# EAGLE board LilyTiny-Panel-v12 (EAGLE 6.5.0), part 1 of 2
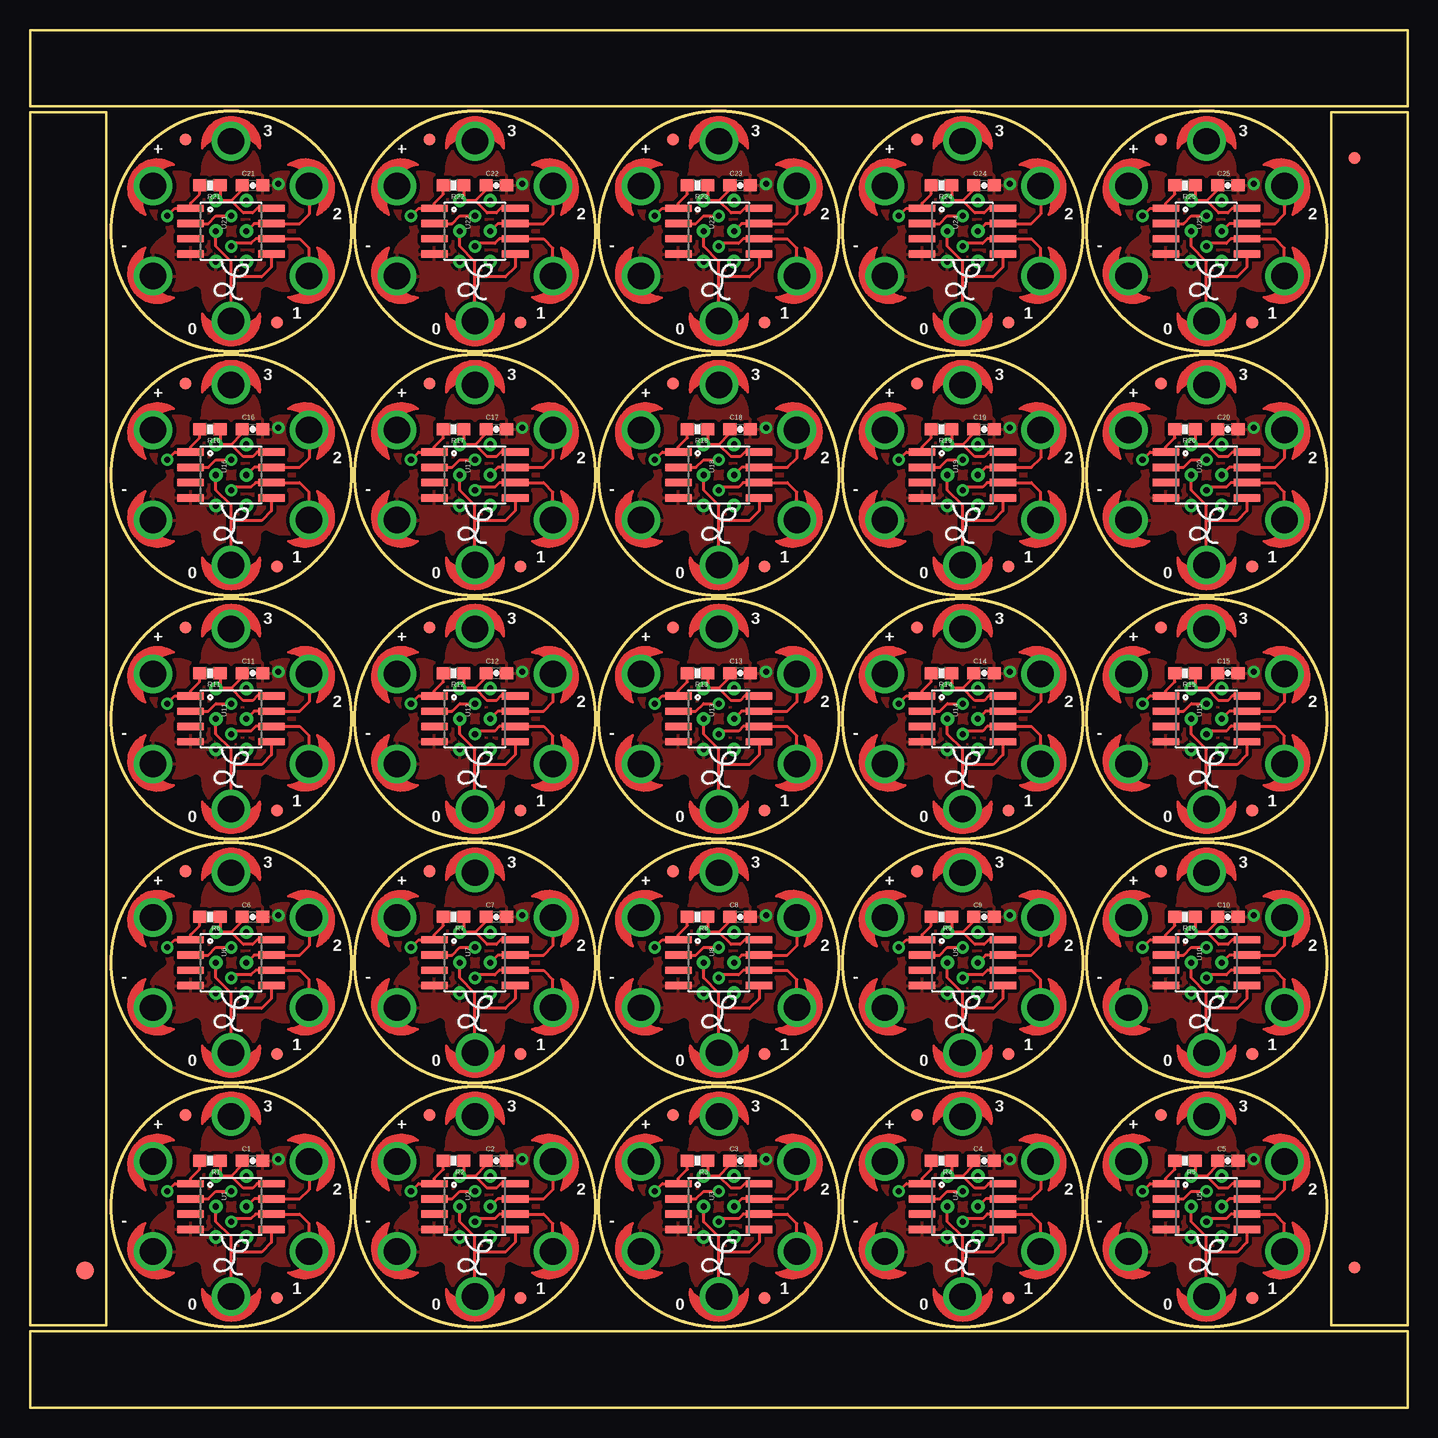
[diagram p0: board, top side]
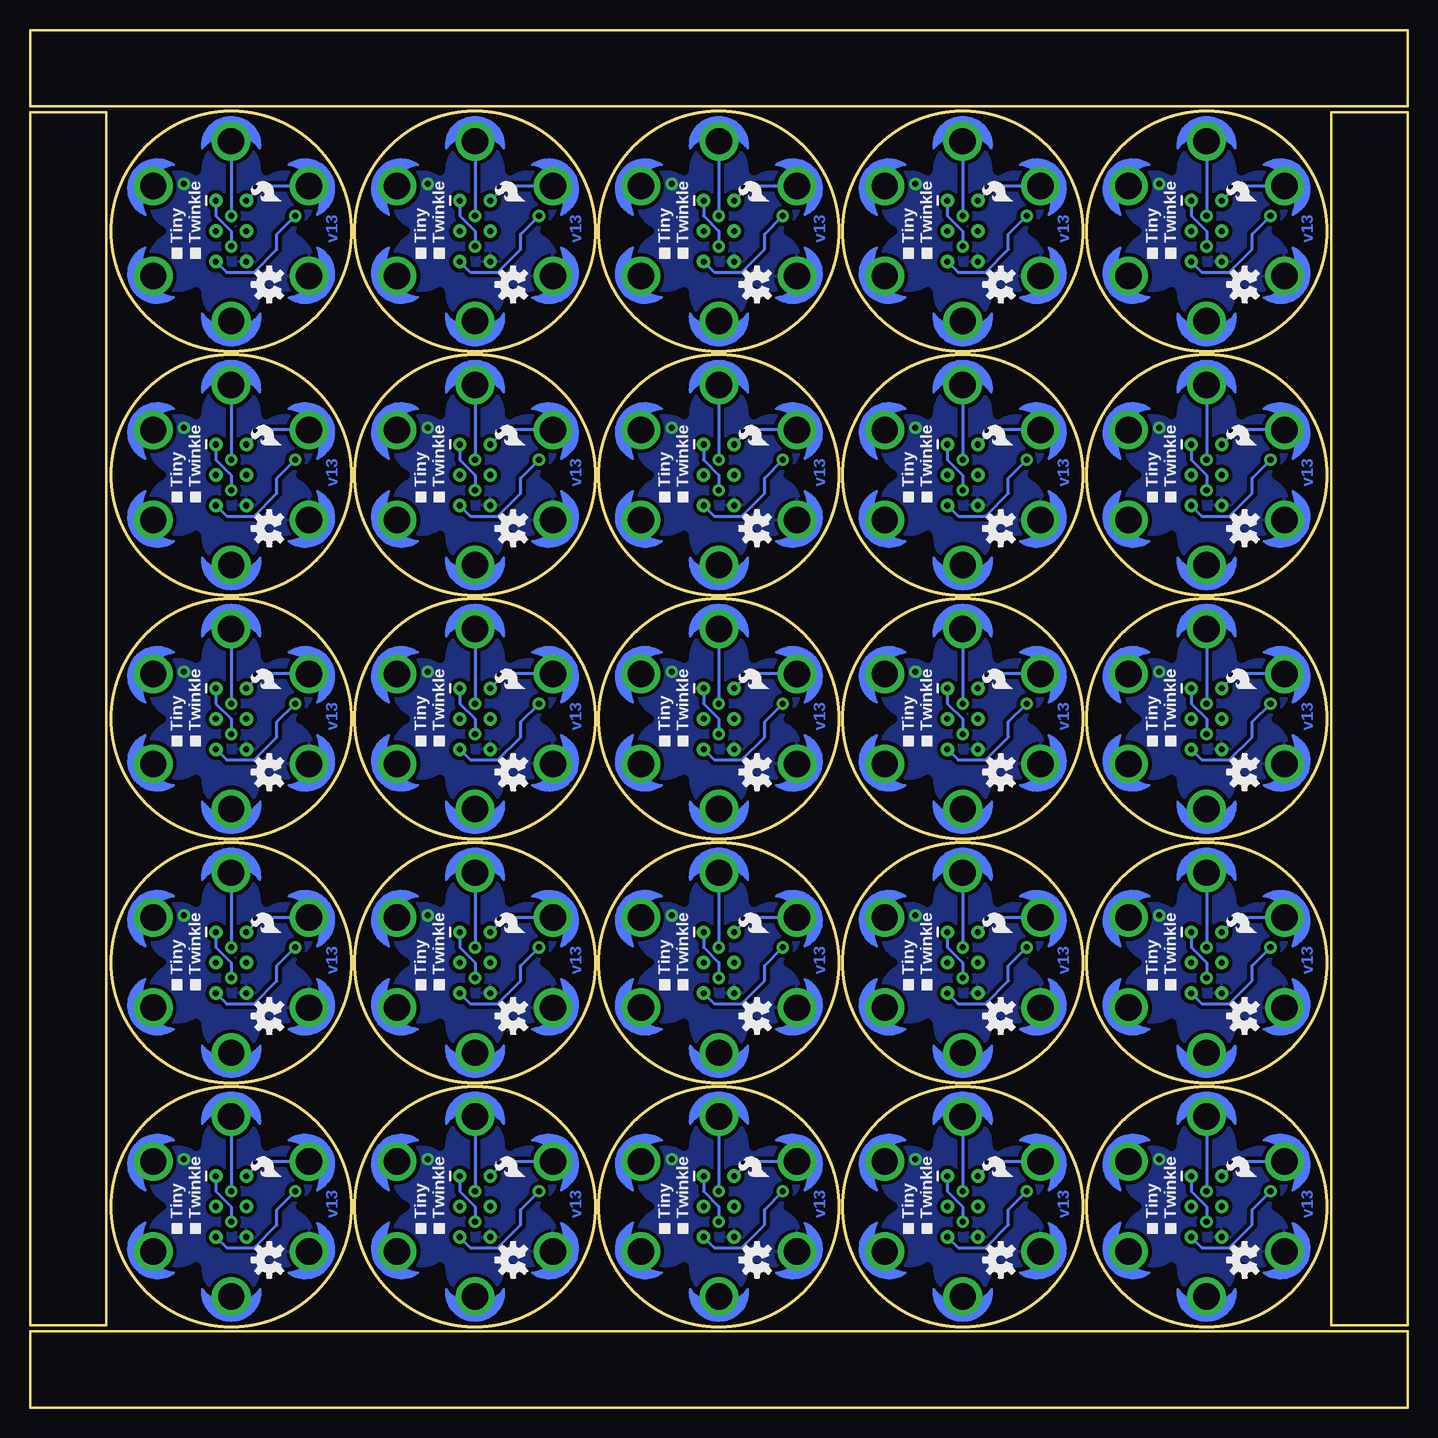
[diagram p1: board, bottom side, seen from below]

Size 114.81 x 114.81 mm. Coordinates in mm from the lower left corner, seen from the top.
Outline: 79.25,0 0,0 0,6.35 29.72,6.35
Outline: 29.21,6.35 114.81,6.35 114.81,0 78.74,0
Outline: 6.35,6.86 6.35,107.95 0,107.95 0,6.86 6.35,6.86
Outline: 114.81,6.86 114.81,107.95 108.46,107.95 108.46,6.86 114.81,6.86
Outline: 114.81,114.81 0,114.81 0,108.46 114.81,108.46 114.81,114.81
Outline: circle at 16.76,16.76 radius 10
Outline: circle at 37.08,16.76 radius 10
Outline: circle at 57.4,16.76 radius 10
Outline: circle at 77.72,16.76 radius 10
Outline: circle at 98.04,16.76 radius 10
Outline: circle at 16.76,37.08 radius 10
Outline: circle at 37.08,37.08 radius 10
Outline: circle at 57.4,37.08 radius 10
Outline: circle at 77.72,37.08 radius 10
Outline: circle at 98.04,37.08 radius 10
Outline: circle at 16.76,57.4 radius 10
Outline: circle at 37.08,57.4 radius 10
Outline: circle at 57.4,57.4 radius 10
Outline: circle at 77.72,57.4 radius 10
Outline: circle at 98.04,57.4 radius 10
Outline: circle at 16.76,77.72 radius 10
Outline: circle at 37.08,77.72 radius 10
Outline: circle at 57.4,77.72 radius 10
Outline: circle at 77.72,77.72 radius 10
Outline: circle at 98.04,77.72 radius 10
Copper layers (1*16): Top 0.035mm / dielectric 1.5mm / Bottom 0.035mm
Design rules "SparkFun-2-layer": minimum track width 7mil, minimum drill 15mil, track to track 8mil, track to pad 8mil, pad to pad 8mil, via to via 8mil, smd to smd 8mil, copper to edge 8mil, drill to drill 8mil, minimum pad ring 12mil, minimum via ring 10mil, stop-mask expansion 4mil, vias tented up to drill 20mil, thermal gap 10mil
tRestrict: area 5.8,16.8 to 16.8,27.8; area 16.8,16.8 to 27.8,27.8; area 16.8,5.8 to 27.8,16.8; area 5.8,5.8 to 16.8,16.8; area 26.1,16.8 to 37.1,27.8; area 37.1,16.8 to 48.1,27.8; area 37.1,5.8 to 48.1,16.8; area 26.1,5.8 to 37.1,16.8; area 46.4,16.8 to 57.4,27.8; area 57.4,16.8 to 68.4,27.8; area 57.4,5.8 to 68.4,16.8; area 46.4,5.8 to 57.4,16.8; 88 more areas; 150 lines
bRestrict: area 5.8,16.8 to 16.8,27.8; area 16.8,16.8 to 27.8,27.8; area 16.8,5.8 to 27.8,16.8; area 5.8,5.8 to 16.8,16.8; area 26.1,16.8 to 37.1,27.8; area 37.1,16.8 to 48.1,27.8; area 37.1,5.8 to 48.1,16.8; area 26.1,5.8 to 37.1,16.8; area 46.4,16.8 to 57.4,27.8; area 57.4,16.8 to 68.4,27.8; area 57.4,5.8 to 68.4,16.8; area 46.4,5.8 to 57.4,16.8; 88 more areas; 150 lines

## Footprints (pad centres in the part's own frame; a part is rotated, then mirrored left to right if it is on the bottom)
0603-CAP = smd 1.1 x 1: 1 -0.85,0; 2 0.85,0
FIDUCIAL-1.5X3 = smd 1.5 x 1.5: 1 0,0
FIDUCIAL-1X2 = smd 1 x 1: 1 0,0
2X3_TEST_POINTS = drill 0.508: 1 -2.54,-1.27; 2 -2.54,1.27; 3 0,-1.27; 4 0,1.27; 5 2.54,-1.27; 6 2.54,1.27
0603-RES = smd 1.1 x 1: 1 -0.85,0; 2 0.85,0
SO08-EIAJ = smd 0.61 x 2.21: 1 -1.905,-3.378; 2 -0.635,-3.378; 3 0.635,-3.378; 4 1.905,-3.378; 5 1.905,3.353; 6 0.635,3.353; 7 -0.635,3.353; 8 -1.905,3.353
PETAL-SMALL-2SIDE = drill 2.2: 1 0,0

## Placement (x,y rotation side)
C1  0.1uF  [0603-CAP]  18.54,20.57 0 top
C2  0.1uF  [0603-CAP]  38.86,20.57 0 top
C3  0.1uF  [0603-CAP]  59.18,20.57 0 top
C4  0.1uF  [0603-CAP]  79.5,20.57 0 top
C5  0.1uF  [0603-CAP]  99.82,20.57 0 top
C6  0.1uF  [0603-CAP]  18.54,40.89 0 top
C7  0.1uF  [0603-CAP]  38.86,40.89 0 top
C8  0.1uF  [0603-CAP]  59.18,40.89 0 top
C9  0.1uF  [0603-CAP]  79.5,40.89 0 top
C10  0.1uF  [0603-CAP]  99.82,40.89 0 top
C11  0.1uF  [0603-CAP]  18.54,61.21 0 top
C12  0.1uF  [0603-CAP]  38.86,61.21 0 top
C13  0.1uF  [0603-CAP]  59.18,61.21 0 top
C14  0.1uF  [0603-CAP]  79.5,61.21 0 top
C15  0.1uF  [0603-CAP]  99.82,61.21 0 top
C16  0.1uF  [0603-CAP]  18.54,81.53 0 top
C17  0.1uF  [0603-CAP]  38.86,81.53 0 top
C18  0.1uF  [0603-CAP]  59.18,81.53 0 top
C19  0.1uF  [0603-CAP]  79.5,81.53 0 top
C20  0.1uF  [0603-CAP]  99.82,81.53 0 top
C21  0.1uF  [0603-CAP]  18.54,101.85 0 top
C22  0.1uF  [0603-CAP]  38.86,101.85 0 top
C23  0.1uF  [0603-CAP]  59.18,101.85 0 top
C24  0.1uF  [0603-CAP]  79.5,101.85 0 top
C25  0.1uF  [0603-CAP]  99.82,101.85 0 top
E$1  [FIDUCIAL-1.5X3]  4.57,11.43 0 top
E$4  [FIDUCIAL-1X2]  110.36,11.68 0 top
E$6  [FIDUCIAL-1X2]  110.36,104.14 180 top
FID1  FIDUCIAL1X2  [FIDUCIAL-1X2]  12.95,24.38 0 top
FID2  FIDUCIAL1X2  [FIDUCIAL-1X2]  20.57,9.14 0 top
FID3  FIDUCIAL1X2  [FIDUCIAL-1X2]  33.27,24.38 0 top
FID4  FIDUCIAL1X2  [FIDUCIAL-1X2]  40.89,9.14 0 top
FID5  FIDUCIAL1X2  [FIDUCIAL-1X2]  53.59,24.38 0 top
FID6  FIDUCIAL1X2  [FIDUCIAL-1X2]  61.21,9.14 0 top
FID7  FIDUCIAL1X2  [FIDUCIAL-1X2]  73.91,24.38 0 top
FID8  FIDUCIAL1X2  [FIDUCIAL-1X2]  81.53,9.14 0 top
FID9  FIDUCIAL1X2  [FIDUCIAL-1X2]  94.23,24.38 0 top
FID10  FIDUCIAL1X2  [FIDUCIAL-1X2]  101.85,9.14 0 top
FID11  FIDUCIAL1X2  [FIDUCIAL-1X2]  12.95,44.7 0 top
FID12  FIDUCIAL1X2  [FIDUCIAL-1X2]  20.57,29.46 0 top
FID13  FIDUCIAL1X2  [FIDUCIAL-1X2]  33.27,44.7 0 top
FID14  FIDUCIAL1X2  [FIDUCIAL-1X2]  40.89,29.46 0 top
FID15  FIDUCIAL1X2  [FIDUCIAL-1X2]  53.59,44.7 0 top
FID16  FIDUCIAL1X2  [FIDUCIAL-1X2]  61.21,29.46 0 top
FID17  FIDUCIAL1X2  [FIDUCIAL-1X2]  73.91,44.7 0 top
FID18  FIDUCIAL1X2  [FIDUCIAL-1X2]  81.53,29.46 0 top
FID19  FIDUCIAL1X2  [FIDUCIAL-1X2]  94.23,44.7 0 top
FID20  FIDUCIAL1X2  [FIDUCIAL-1X2]  101.85,29.46 0 top
FID21  FIDUCIAL1X2  [FIDUCIAL-1X2]  12.95,65.02 0 top
FID22  FIDUCIAL1X2  [FIDUCIAL-1X2]  20.57,49.78 0 top
FID23  FIDUCIAL1X2  [FIDUCIAL-1X2]  33.27,65.02 0 top
FID24  FIDUCIAL1X2  [FIDUCIAL-1X2]  40.89,49.78 0 top
FID25  FIDUCIAL1X2  [FIDUCIAL-1X2]  53.59,65.02 0 top
FID26  FIDUCIAL1X2  [FIDUCIAL-1X2]  61.21,49.78 0 top
FID27  FIDUCIAL1X2  [FIDUCIAL-1X2]  73.91,65.02 0 top
FID28  FIDUCIAL1X2  [FIDUCIAL-1X2]  81.53,49.78 0 top
FID29  FIDUCIAL1X2  [FIDUCIAL-1X2]  94.23,65.02 0 top
FID30  FIDUCIAL1X2  [FIDUCIAL-1X2]  101.85,49.78 0 top
FID31  FIDUCIAL1X2  [FIDUCIAL-1X2]  12.95,85.34 0 top
FID32  FIDUCIAL1X2  [FIDUCIAL-1X2]  20.57,70.1 0 top
FID33  FIDUCIAL1X2  [FIDUCIAL-1X2]  33.27,85.34 0 top
FID34  FIDUCIAL1X2  [FIDUCIAL-1X2]  40.89,70.1 0 top
FID35  FIDUCIAL1X2  [FIDUCIAL-1X2]  53.59,85.34 0 top
FID36  FIDUCIAL1X2  [FIDUCIAL-1X2]  61.21,70.1 0 top
FID37  FIDUCIAL1X2  [FIDUCIAL-1X2]  73.91,85.34 0 top
FID38  FIDUCIAL1X2  [FIDUCIAL-1X2]  81.53,70.1 0 top
FID39  FIDUCIAL1X2  [FIDUCIAL-1X2]  94.23,85.34 0 top
FID40  FIDUCIAL1X2  [FIDUCIAL-1X2]  101.85,70.1 0 top
FID41  FIDUCIAL1X2  [FIDUCIAL-1X2]  12.95,105.66 0 top
FID42  FIDUCIAL1X2  [FIDUCIAL-1X2]  20.57,90.42 0 top
FID43  FIDUCIAL1X2  [FIDUCIAL-1X2]  33.27,105.66 0 top
FID44  FIDUCIAL1X2  [FIDUCIAL-1X2]  40.89,90.42 0 top
FID45  FIDUCIAL1X2  [FIDUCIAL-1X2]  53.59,105.66 0 top
FID46  FIDUCIAL1X2  [FIDUCIAL-1X2]  61.21,90.42 0 top
FID47  FIDUCIAL1X2  [FIDUCIAL-1X2]  73.91,105.66 0 top
FID48  FIDUCIAL1X2  [FIDUCIAL-1X2]  81.53,90.42 0 top
FID49  FIDUCIAL1X2  [FIDUCIAL-1X2]  94.23,105.66 0 top
FID50  FIDUCIAL1X2  [FIDUCIAL-1X2]  101.85,90.42 0 top
J1  [2X3_TEST_POINTS]  16.76,16.76 270 bottom
J2  [2X3_TEST_POINTS]  37.08,16.76 270 bottom
J3  [2X3_TEST_POINTS]  57.4,16.76 270 bottom
J4  [2X3_TEST_POINTS]  77.72,16.76 270 bottom
J5  [2X3_TEST_POINTS]  98.04,16.76 270 bottom
J6  [2X3_TEST_POINTS]  16.76,37.08 270 bottom
J7  [2X3_TEST_POINTS]  37.08,37.08 270 bottom
J8  [2X3_TEST_POINTS]  57.4,37.08 270 bottom
J9  [2X3_TEST_POINTS]  77.72,37.08 270 bottom
J10  [2X3_TEST_POINTS]  98.04,37.08 270 bottom
J11  [2X3_TEST_POINTS]  16.76,57.4 270 bottom
J12  [2X3_TEST_POINTS]  37.08,57.4 270 bottom
J13  [2X3_TEST_POINTS]  57.4,57.4 270 bottom
J14  [2X3_TEST_POINTS]  77.72,57.4 270 bottom
J15  [2X3_TEST_POINTS]  98.04,57.4 270 bottom
J16  [2X3_TEST_POINTS]  16.76,77.72 270 bottom
J17  [2X3_TEST_POINTS]  37.08,77.72 270 bottom
J18  [2X3_TEST_POINTS]  57.4,77.72 270 bottom
J19  [2X3_TEST_POINTS]  77.72,77.72 270 bottom
J20  [2X3_TEST_POINTS]  98.04,77.72 270 bottom
J21  [2X3_TEST_POINTS]  16.76,98.04 270 bottom
J22  [2X3_TEST_POINTS]  37.08,98.04 270 bottom
J23  [2X3_TEST_POINTS]  57.4,98.04 270 bottom
J24  [2X3_TEST_POINTS]  77.72,98.04 270 bottom
J25  [2X3_TEST_POINTS]  98.04,98.04 270 bottom
LOGO1  OSHW-LOGOS  [OSHW-LOGO-S]  13.59,12.32 90 bottom
LOGO2  SFE_LOGO_FLAME.1_INCH  [SFE_LOGO_FLAME_.1]  12.22,18.94 90 bottom
LOGO3  OSHW-LOGOS  [OSHW-LOGO-S]  33.91,12.32 90 bottom
LOGO4  SFE_LOGO_FLAME.1_INCH  [SFE_LOGO_FLAME_.1]  32.54,18.94 90 bottom
LOGO5  OSHW-LOGOS  [OSHW-LOGO-S]  54.23,12.32 90 bottom
LOGO6  SFE_LOGO_FLAME.1_INCH  [SFE_LOGO_FLAME_.1]  52.86,18.94 90 bottom
LOGO7  OSHW-LOGOS  [OSHW-LOGO-S]  74.55,12.32 90 bottom
LOGO8  SFE_LOGO_FLAME.1_INCH  [SFE_LOGO_FLAME_.1]  73.18,18.94 90 bottom
LOGO9  OSHW-LOGOS  [OSHW-LOGO-S]  94.87,12.32 90 bottom
LOGO10  SFE_LOGO_FLAME.1_INCH  [SFE_LOGO_FLAME_.1]  93.5,18.94 90 bottom
LOGO11  OSHW-LOGOS  [OSHW-LOGO-S]  13.59,32.64 90 bottom
LOGO12  SFE_LOGO_FLAME.1_INCH  [SFE_LOGO_FLAME_.1]  12.22,39.26 90 bottom
LOGO13  OSHW-LOGOS  [OSHW-LOGO-S]  33.91,32.64 90 bottom
LOGO14  SFE_LOGO_FLAME.1_INCH  [SFE_LOGO_FLAME_.1]  32.54,39.26 90 bottom
LOGO15  OSHW-LOGOS  [OSHW-LOGO-S]  54.23,32.64 90 bottom
LOGO16  SFE_LOGO_FLAME.1_INCH  [SFE_LOGO_FLAME_.1]  52.86,39.26 90 bottom
LOGO17  OSHW-LOGOS  [OSHW-LOGO-S]  74.55,32.64 90 bottom
LOGO18  SFE_LOGO_FLAME.1_INCH  [SFE_LOGO_FLAME_.1]  73.18,39.26 90 bottom
LOGO19  OSHW-LOGOS  [OSHW-LOGO-S]  94.87,32.64 90 bottom
LOGO20  SFE_LOGO_FLAME.1_INCH  [SFE_LOGO_FLAME_.1]  93.5,39.26 90 bottom
LOGO21  OSHW-LOGOS  [OSHW-LOGO-S]  13.59,52.96 90 bottom
LOGO22  SFE_LOGO_FLAME.1_INCH  [SFE_LOGO_FLAME_.1]  12.22,59.58 90 bottom
LOGO23  OSHW-LOGOS  [OSHW-LOGO-S]  33.91,52.96 90 bottom
LOGO24  SFE_LOGO_FLAME.1_INCH  [SFE_LOGO_FLAME_.1]  32.54,59.58 90 bottom
LOGO25  OSHW-LOGOS  [OSHW-LOGO-S]  54.23,52.96 90 bottom
LOGO26  SFE_LOGO_FLAME.1_INCH  [SFE_LOGO_FLAME_.1]  52.86,59.58 90 bottom
LOGO27  OSHW-LOGOS  [OSHW-LOGO-S]  74.55,52.96 90 bottom
LOGO28  SFE_LOGO_FLAME.1_INCH  [SFE_LOGO_FLAME_.1]  73.18,59.58 90 bottom
LOGO29  OSHW-LOGOS  [OSHW-LOGO-S]  94.87,52.96 90 bottom
LOGO30  SFE_LOGO_FLAME.1_INCH  [SFE_LOGO_FLAME_.1]  93.5,59.58 90 bottom
LOGO31  OSHW-LOGOS  [OSHW-LOGO-S]  13.59,73.28 90 bottom
LOGO32  SFE_LOGO_FLAME.1_INCH  [SFE_LOGO_FLAME_.1]  12.22,79.9 90 bottom
LOGO33  OSHW-LOGOS  [OSHW-LOGO-S]  33.91,73.28 90 bottom
LOGO34  SFE_LOGO_FLAME.1_INCH  [SFE_LOGO_FLAME_.1]  32.54,79.9 90 bottom
LOGO35  OSHW-LOGOS  [OSHW-LOGO-S]  54.23,73.28 90 bottom
LOGO36  SFE_LOGO_FLAME.1_INCH  [SFE_LOGO_FLAME_.1]  52.86,79.9 90 bottom
LOGO37  OSHW-LOGOS  [OSHW-LOGO-S]  74.55,73.28 90 bottom
LOGO38  SFE_LOGO_FLAME.1_INCH  [SFE_LOGO_FLAME_.1]  73.18,79.9 90 bottom
LOGO39  OSHW-LOGOS  [OSHW-LOGO-S]  94.87,73.28 90 bottom
LOGO40  SFE_LOGO_FLAME.1_INCH  [SFE_LOGO_FLAME_.1]  93.5,79.9 90 bottom
LOGO41  OSHW-LOGOS  [OSHW-LOGO-S]  13.59,93.6 90 bottom
LOGO42  SFE_LOGO_FLAME.1_INCH  [SFE_LOGO_FLAME_.1]  12.22,100.22 90 bottom
LOGO43  OSHW-LOGOS  [OSHW-LOGO-S]  33.91,93.6 90 bottom
LOGO44  SFE_LOGO_FLAME.1_INCH  [SFE_LOGO_FLAME_.1]  32.54,100.22 90 bottom
LOGO45  OSHW-LOGOS  [OSHW-LOGO-S]  54.23,93.6 90 bottom
LOGO46  SFE_LOGO_FLAME.1_INCH  [SFE_LOGO_FLAME_.1]  52.86,100.22 90 bottom
LOGO47  OSHW-LOGOS  [OSHW-LOGO-S]  74.55,93.6 90 bottom
LOGO48  SFE_LOGO_FLAME.1_INCH  [SFE_LOGO_FLAME_.1]  73.18,100.22 90 bottom
LOGO49  OSHW-LOGOS  [OSHW-LOGO-S]  94.87,93.6 90 bottom
LOGO50  SFE_LOGO_FLAME.1_INCH  [SFE_LOGO_FLAME_.1]  93.5,100.22 90 bottom
R1  10k  [0603-RES]  14.99,20.57 180 top
R2  10k  [0603-RES]  35.31,20.57 180 top
R3  10k  [0603-RES]  55.63,20.57 180 top
R4  10k  [0603-RES]  75.95,20.57 180 top
R5  10k  [0603-RES]  96.27,20.57 180 top
R6  10k  [0603-RES]  14.99,40.89 180 top
R7  10k  [0603-RES]  35.31,40.89 180 top
R8  10k  [0603-RES]  55.63,40.89 180 top
R9  10k  [0603-RES]  75.95,40.89 180 top
R10  10k  [0603-RES]  96.27,40.89 180 top
R11  10k  [0603-RES]  14.99,61.21 180 top
R12  10k  [0603-RES]  35.31,61.21 180 top
R13  10k  [0603-RES]  55.63,61.21 180 top
R14  10k  [0603-RES]  75.95,61.21 180 top
R15  10k  [0603-RES]  96.27,61.21 180 top
R16  10k  [0603-RES]  14.99,81.53 180 top
R17  10k  [0603-RES]  35.31,81.53 180 top
R18  10k  [0603-RES]  55.63,81.53 180 top
R19  10k  [0603-RES]  75.95,81.53 180 top
R20  10k  [0603-RES]  96.27,81.53 180 top
R21  10k  [0603-RES]  14.99,101.85 180 top
R22  10k  [0603-RES]  35.31,101.85 180 top
R23  10k  [0603-RES]  55.63,101.85 180 top
R24  10k  [0603-RES]  75.95,101.85 180 top
R25  10k  [0603-RES]  96.27,101.85 180 top
U1  ATTINY85  [SO08-EIAJ]  16.76,16.76 270 top
U2  ATTINY85  [SO08-EIAJ]  37.08,16.76 270 top
U3  ATTINY85  [SO08-EIAJ]  57.4,16.76 270 top
U4  ATTINY85  [SO08-EIAJ]  77.72,16.76 270 top
U5  ATTINY85  [SO08-EIAJ]  98.04,16.76 270 top
U6  ATTINY85  [SO08-EIAJ]  16.76,37.08 270 top
U7  ATTINY85  [SO08-EIAJ]  37.08,37.08 270 top
U8  ATTINY85  [SO08-EIAJ]  57.4,37.08 270 top
U9  ATTINY85  [SO08-EIAJ]  77.72,37.08 270 top
U10  ATTINY85  [SO08-EIAJ]  98.04,37.08 270 top
U11  ATTINY85  [SO08-EIAJ]  16.76,57.4 270 top
U12  ATTINY85  [SO08-EIAJ]  37.08,57.4 270 top
U13  ATTINY85  [SO08-EIAJ]  57.4,57.4 270 top
U14  ATTINY85  [SO08-EIAJ]  77.72,57.4 270 top
U15  ATTINY85  [SO08-EIAJ]  98.04,57.4 270 top
U16  ATTINY85  [SO08-EIAJ]  16.76,77.72 270 top
U17  ATTINY85  [SO08-EIAJ]  37.08,77.72 270 top
U18  ATTINY85  [SO08-EIAJ]  57.4,77.72 270 top
U19  ATTINY85  [SO08-EIAJ]  77.72,77.72 270 top
U20  ATTINY85  [SO08-EIAJ]  98.04,77.72 270 top
U21  ATTINY85  [SO08-EIAJ]  16.76,98.04 270 top
U22  ATTINY85  [SO08-EIAJ]  37.08,98.04 270 top
U23  ATTINY85  [SO08-EIAJ]  57.4,98.04 270 top
U24  ATTINY85  [SO08-EIAJ]  77.72,98.04 270 top
U25  ATTINY85  [SO08-EIAJ]  98.04,98.04 270 top
U$1  SEWTAP6  [PETAL-SMALL-2SIDE]  30.59,13.01 300 top
U$2  SEWTAP6  [PETAL-SMALL-2SIDE]  10.27,13.01 300 top
U$3  SEWTAP6  [PETAL-SMALL-2SIDE]  23.26,13.01 60 top
U$4  SEWTAP6  [PETAL-SMALL-2SIDE]  23.26,20.52 120 top
U$5  SEWTAP6  [PETAL-SMALL-2SIDE]  10.27,20.52 240 top
U$6  SEWTAP6  [PETAL-SMALL-2SIDE]  16.76,24.26 180 top
U$7  SEWTAP6  [PETAL-SMALL-2SIDE]  16.76,9.26 0 top
U$8  LOGO-LPL  [LOGO-L]  16.76,12.7 0 top
U$9  SEWTAP6  [PETAL-SMALL-2SIDE]  43.58,13.01 60 top
U$10  SEWTAP6  [PETAL-SMALL-2SIDE]  43.58,20.52 120 top
U$11  SEWTAP6  [PETAL-SMALL-2SIDE]  30.59,20.52 240 top
U$12  SEWTAP6  [PETAL-SMALL-2SIDE]  37.08,24.26 180 top
U$13  SEWTAP6  [PETAL-SMALL-2SIDE]  37.08,9.26 0 top
U$14  LOGO-LPL  [LOGO-L]  37.08,12.7 0 top
U$15  SEWTAP6  [PETAL-SMALL-2SIDE]  50.91,13.01 300 top
U$16  SEWTAP6  [PETAL-SMALL-2SIDE]  63.9,13.01 60 top
U$17  SEWTAP6  [PETAL-SMALL-2SIDE]  63.9,20.52 120 top
U$18  SEWTAP6  [PETAL-SMALL-2SIDE]  50.91,20.52 240 top
U$19  SEWTAP6  [PETAL-SMALL-2SIDE]  57.4,24.26 180 top
U$20  SEWTAP6  [PETAL-SMALL-2SIDE]  57.4,9.26 0 top
U$21  LOGO-LPL  [LOGO-L]  57.4,12.7 0 top
U$22  SEWTAP6  [PETAL-SMALL-2SIDE]  71.23,13.01 300 top
U$23  SEWTAP6  [PETAL-SMALL-2SIDE]  84.22,13.01 60 top
U$24  SEWTAP6  [PETAL-SMALL-2SIDE]  84.22,20.52 120 top
U$25  SEWTAP6  [PETAL-SMALL-2SIDE]  71.23,20.52 240 top
U$26  SEWTAP6  [PETAL-SMALL-2SIDE]  77.72,24.26 180 top
U$27  SEWTAP6  [PETAL-SMALL-2SIDE]  77.72,9.26 0 top
U$28  LOGO-LPL  [LOGO-L]  77.72,12.7 0 top
U$29  SEWTAP6  [PETAL-SMALL-2SIDE]  91.55,13.01 300 top
U$30  SEWTAP6  [PETAL-SMALL-2SIDE]  104.54,13.01 60 top
U$31  SEWTAP6  [PETAL-SMALL-2SIDE]  104.54,20.52 120 top
U$32  SEWTAP6  [PETAL-SMALL-2SIDE]  91.55,20.52 240 top
U$33  SEWTAP6  [PETAL-SMALL-2SIDE]  98.04,24.26 180 top
U$34  SEWTAP6  [PETAL-SMALL-2SIDE]  98.04,9.26 0 top
U$35  LOGO-LPL  [LOGO-L]  98.04,12.7 0 top
U$36  SEWTAP6  [PETAL-SMALL-2SIDE]  10.27,33.33 300 top
U$37  SEWTAP6  [PETAL-SMALL-2SIDE]  23.26,33.33 60 top
U$38  SEWTAP6  [PETAL-SMALL-2SIDE]  23.26,40.84 120 top
U$39  SEWTAP6  [PETAL-SMALL-2SIDE]  10.27,40.84 240 top
U$40  SEWTAP6  [PETAL-SMALL-2SIDE]  16.76,44.58 180 top
U$41  SEWTAP6  [PETAL-SMALL-2SIDE]  16.76,29.58 0 top
U$42  LOGO-LPL  [LOGO-L]  16.76,33.02 0 top
U$43  SEWTAP6  [PETAL-SMALL-2SIDE]  30.59,33.33 300 top
U$44  SEWTAP6  [PETAL-SMALL-2SIDE]  43.58,33.33 60 top
U$45  SEWTAP6  [PETAL-SMALL-2SIDE]  43.58,40.84 120 top
U$46  SEWTAP6  [PETAL-SMALL-2SIDE]  30.59,40.84 240 top
U$47  SEWTAP6  [PETAL-SMALL-2SIDE]  37.08,44.58 180 top
U$48  SEWTAP6  [PETAL-SMALL-2SIDE]  37.08,29.58 0 top
U$49  LOGO-LPL  [LOGO-L]  37.08,33.02 0 top
U$50  SEWTAP6  [PETAL-SMALL-2SIDE]  50.91,33.33 300 top
U$51  SEWTAP6  [PETAL-SMALL-2SIDE]  63.9,33.33 60 top
U$52  SEWTAP6  [PETAL-SMALL-2SIDE]  63.9,40.84 120 top
U$53  SEWTAP6  [PETAL-SMALL-2SIDE]  50.91,40.84 240 top
U$54  SEWTAP6  [PETAL-SMALL-2SIDE]  57.4,44.58 180 top
U$55  SEWTAP6  [PETAL-SMALL-2SIDE]  57.4,29.58 0 top
U$56  LOGO-LPL  [LOGO-L]  57.4,33.02 0 top
U$57  SEWTAP6  [PETAL-SMALL-2SIDE]  71.23,33.33 300 top
U$58  SEWTAP6  [PETAL-SMALL-2SIDE]  84.22,33.33 60 top
U$59  SEWTAP6  [PETAL-SMALL-2SIDE]  84.22,40.84 120 top
U$60  SEWTAP6  [PETAL-SMALL-2SIDE]  71.23,40.84 240 top
U$61  SEWTAP6  [PETAL-SMALL-2SIDE]  77.72,44.58 180 top
U$62  SEWTAP6  [PETAL-SMALL-2SIDE]  77.72,29.58 0 top
U$63  LOGO-LPL  [LOGO-L]  77.72,33.02 0 top
U$64  SEWTAP6  [PETAL-SMALL-2SIDE]  91.55,33.33 300 top
U$65  SEWTAP6  [PETAL-SMALL-2SIDE]  104.54,33.33 60 top
U$66  SEWTAP6  [PETAL-SMALL-2SIDE]  104.54,40.84 120 top
U$67  SEWTAP6  [PETAL-SMALL-2SIDE]  91.55,40.84 240 top
U$68  SEWTAP6  [PETAL-SMALL-2SIDE]  98.04,44.58 180 top
U$69  SEWTAP6  [PETAL-SMALL-2SIDE]  98.04,29.58 0 top
U$70  LOGO-LPL  [LOGO-L]  98.04,33.02 0 top
U$71  SEWTAP6  [PETAL-SMALL-2SIDE]  10.27,53.65 300 top
U$72  SEWTAP6  [PETAL-SMALL-2SIDE]  23.26,53.65 60 top
U$73  SEWTAP6  [PETAL-SMALL-2SIDE]  23.26,61.16 120 top
U$74  SEWTAP6  [PETAL-SMALL-2SIDE]  10.27,61.16 240 top
U$75  SEWTAP6  [PETAL-SMALL-2SIDE]  16.76,64.9 180 top
U$76  SEWTAP6  [PETAL-SMALL-2SIDE]  16.76,49.9 0 top
U$77  LOGO-LPL  [LOGO-L]  16.76,53.34 0 top
U$78  SEWTAP6  [PETAL-SMALL-2SIDE]  30.59,53.65 300 top
U$79  SEWTAP6  [PETAL-SMALL-2SIDE]  43.58,53.65 60 top
U$80  SEWTAP6  [PETAL-SMALL-2SIDE]  43.58,61.16 120 top
U$81  SEWTAP6  [PETAL-SMALL-2SIDE]  30.59,61.16 240 top
U$82  SEWTAP6  [PETAL-SMALL-2SIDE]  37.08,64.9 180 top
U$83  SEWTAP6  [PETAL-SMALL-2SIDE]  37.08,49.9 0 top
U$84  LOGO-LPL  [LOGO-L]  37.08,53.34 0 top
U$85  SEWTAP6  [PETAL-SMALL-2SIDE]  50.91,53.65 300 top
U$86  SEWTAP6  [PETAL-SMALL-2SIDE]  63.9,53.65 60 top
U$87  SEWTAP6  [PETAL-SMALL-2SIDE]  63.9,61.16 120 top
U$88  SEWTAP6  [PETAL-SMALL-2SIDE]  50.91,61.16 240 top
U$89  SEWTAP6  [PETAL-SMALL-2SIDE]  57.4,64.9 180 top
U$90  SEWTAP6  [PETAL-SMALL-2SIDE]  57.4,49.9 0 top
U$91  LOGO-LPL  [LOGO-L]  57.4,53.34 0 top
U$92  SEWTAP6  [PETAL-SMALL-2SIDE]  71.23,53.65 300 top
U$93  SEWTAP6  [PETAL-SMALL-2SIDE]  84.22,53.65 60 top
U$94  SEWTAP6  [PETAL-SMALL-2SIDE]  84.22,61.16 120 top
U$95  SEWTAP6  [PETAL-SMALL-2SIDE]  71.23,61.16 240 top
U$96  SEWTAP6  [PETAL-SMALL-2SIDE]  77.72,64.9 180 top
U$97  SEWTAP6  [PETAL-SMALL-2SIDE]  77.72,49.9 0 top
U$98  LOGO-LPL  [LOGO-L]  77.72,53.34 0 top
U$99  SEWTAP6  [PETAL-SMALL-2SIDE]  91.55,53.65 300 top
U$100  SEWTAP6  [PETAL-SMALL-2SIDE]  104.54,53.65 60 top
U$101  SEWTAP6  [PETAL-SMALL-2SIDE]  104.54,61.16 120 top
U$102  SEWTAP6  [PETAL-SMALL-2SIDE]  91.55,61.16 240 top
U$103  SEWTAP6  [PETAL-SMALL-2SIDE]  98.04,64.9 180 top
U$104  SEWTAP6  [PETAL-SMALL-2SIDE]  98.04,49.9 0 top
U$105  LOGO-LPL  [LOGO-L]  98.04,53.34 0 top
U$106  SEWTAP6  [PETAL-SMALL-2SIDE]  10.27,73.97 300 top
U$107  SEWTAP6  [PETAL-SMALL-2SIDE]  23.26,73.97 60 top
U$108  SEWTAP6  [PETAL-SMALL-2SIDE]  23.26,81.48 120 top
U$109  SEWTAP6  [PETAL-SMALL-2SIDE]  10.27,81.48 240 top
U$110  SEWTAP6  [PETAL-SMALL-2SIDE]  16.76,85.22 180 top
U$111  SEWTAP6  [PETAL-SMALL-2SIDE]  16.76,70.22 0 top
U$112  LOGO-LPL  [LOGO-L]  16.76,73.66 0 top
U$113  SEWTAP6  [PETAL-SMALL-2SIDE]  30.59,73.97 300 top
U$114  SEWTAP6  [PETAL-SMALL-2SIDE]  43.58,73.97 60 top
U$115  SEWTAP6  [PETAL-SMALL-2SIDE]  43.58,81.48 120 top
U$116  SEWTAP6  [PETAL-SMALL-2SIDE]  30.59,81.48 240 top
U$117  SEWTAP6  [PETAL-SMALL-2SIDE]  37.08,85.22 180 top
U$118  SEWTAP6  [PETAL-SMALL-2SIDE]  37.08,70.22 0 top
U$119  LOGO-LPL  [LOGO-L]  37.08,73.66 0 top
U$120  SEWTAP6  [PETAL-SMALL-2SIDE]  50.91,73.97 300 top
U$121  SEWTAP6  [PETAL-SMALL-2SIDE]  63.9,73.97 60 top
U$122  SEWTAP6  [PETAL-SMALL-2SIDE]  63.9,81.48 120 top
U$123  SEWTAP6  [PETAL-SMALL-2SIDE]  50.91,81.48 240 top
U$124  SEWTAP6  [PETAL-SMALL-2SIDE]  57.4,85.22 180 top
U$125  SEWTAP6  [PETAL-SMALL-2SIDE]  57.4,70.22 0 top
U$126  LOGO-LPL  [LOGO-L]  57.4,73.66 0 top
U$127  SEWTAP6  [PETAL-SMALL-2SIDE]  71.23,73.97 300 top
U$128  SEWTAP6  [PETAL-SMALL-2SIDE]  84.22,73.97 60 top
U$129  SEWTAP6  [PETAL-SMALL-2SIDE]  84.22,81.48 120 top
U$130  SEWTAP6  [PETAL-SMALL-2SIDE]  71.23,81.48 240 top
U$131  SEWTAP6  [PETAL-SMALL-2SIDE]  77.72,85.22 180 top
U$132  SEWTAP6  [PETAL-SMALL-2SIDE]  77.72,70.22 0 top
U$133  LOGO-LPL  [LOGO-L]  77.72,73.66 0 top
U$134  SEWTAP6  [PETAL-SMALL-2SIDE]  91.55,73.97 300 top
U$135  SEWTAP6  [PETAL-SMALL-2SIDE]  104.54,73.97 60 top
U$136  SEWTAP6  [PETAL-SMALL-2SIDE]  104.54,81.48 120 top
U$137  SEWTAP6  [PETAL-SMALL-2SIDE]  91.55,81.48 240 top
U$138  SEWTAP6  [PETAL-SMALL-2SIDE]  98.04,85.22 180 top
U$139  SEWTAP6  [PETAL-SMALL-2SIDE]  98.04,70.22 0 top
U$140  LOGO-LPL  [LOGO-L]  98.04,73.66 0 top
U$141  SEWTAP6  [PETAL-SMALL-2SIDE]  10.27,94.29 300 top
U$142  SEWTAP6  [PETAL-SMALL-2SIDE]  23.26,94.29 60 top
U$143  SEWTAP6  [PETAL-SMALL-2SIDE]  23.26,101.8 120 top
U$144  SEWTAP6  [PETAL-SMALL-2SIDE]  10.27,101.8 240 top
U$145  SEWTAP6  [PETAL-SMALL-2SIDE]  16.76,105.54 180 top
U$146  SEWTAP6  [PETAL-SMALL-2SIDE]  16.76,90.54 0 top
U$147  LOGO-LPL  [LOGO-L]  16.76,93.98 0 top
U$148  SEWTAP6  [PETAL-SMALL-2SIDE]  30.59,94.29 300 top
U$149  SEWTAP6  [PETAL-SMALL-2SIDE]  43.58,94.29 60 top
U$150  SEWTAP6  [PETAL-SMALL-2SIDE]  43.58,101.8 120 top
U$151  SEWTAP6  [PETAL-SMALL-2SIDE]  30.59,101.8 240 top
U$152  SEWTAP6  [PETAL-SMALL-2SIDE]  37.08,105.54 180 top
U$153  SEWTAP6  [PETAL-SMALL-2SIDE]  37.08,90.54 0 top
U$154  LOGO-LPL  [LOGO-L]  37.08,93.98 0 top
U$155  SEWTAP6  [PETAL-SMALL-2SIDE]  50.91,94.29 300 top
U$156  SEWTAP6  [PETAL-SMALL-2SIDE]  63.9,94.29 60 top
U$157  SEWTAP6  [PETAL-SMALL-2SIDE]  63.9,101.8 120 top
U$158  SEWTAP6  [PETAL-SMALL-2SIDE]  50.91,101.8 240 top
U$159  SEWTAP6  [PETAL-SMALL-2SIDE]  57.4,105.54 180 top
U$160  SEWTAP6  [PETAL-SMALL-2SIDE]  57.4,90.54 0 top
U$161  LOGO-LPL  [LOGO-L]  57.4,93.98 0 top
U$162  SEWTAP6  [PETAL-SMALL-2SIDE]  71.23,94.29 300 top
U$163  SEWTAP6  [PETAL-SMALL-2SIDE]  84.22,94.29 60 top
U$164  SEWTAP6  [PETAL-SMALL-2SIDE]  84.22,101.8 120 top
U$165  SEWTAP6  [PETAL-SMALL-2SIDE]  71.23,101.8 240 top
U$166  SEWTAP6  [PETAL-SMALL-2SIDE]  77.72,105.54 180 top
U$167  SEWTAP6  [PETAL-SMALL-2SIDE]  77.72,90.54 0 top
U$168  LOGO-LPL  [LOGO-L]  77.72,93.98 0 top
U$169  SEWTAP6  [PETAL-SMALL-2SIDE]  91.55,94.29 300 top
U$170  SEWTAP6  [PETAL-SMALL-2SIDE]  104.54,94.29 60 top
U$171  SEWTAP6  [PETAL-SMALL-2SIDE]  104.54,101.8 120 top
U$172  SEWTAP6  [PETAL-SMALL-2SIDE]  91.55,101.8 240 top
U$173  SEWTAP6  [PETAL-SMALL-2SIDE]  98.04,105.54 180 top
U$174  SEWTAP6  [PETAL-SMALL-2SIDE]  98.04,90.54 0 top
U$175  LOGO-LPL  [LOGO-L]  98.04,93.98 0 top

## Library data of the parts
C1-C25 R1-R25 U1-U25 = SparkFun
E$1 = SparkFun-Retired
E$4 E$6 FID1-FID50 LOGO1-LOGO50 = SparkFun-Aesthetics
J1-J25 = SparkFun-Connectors
U$1-U$175 = LilyPad-Wearables

## Nets
GND: C1.2 J1.6 U1.4 U$2.1
GND1: C2.2 J2.6 U2.4 U$1.1
GND2: C3.2 J3.6 U3.4 U$15.1
GND3: C4.2 J4.6 U4.4 U$22.1
GND4: C5.2 J5.6 U5.4 U$29.1
GND5: C6.2 J6.6 U6.4 U$36.1
GND6: C7.2 J7.6 U7.4 U$43.1
GND7: C8.2 J8.6 U8.4 U$50.1
GND8: C9.2 J9.6 U9.4 U$57.1
GND9: C10.2 J10.6 U10.4 U$64.1
GND10: C11.2 J11.6 U11.4 U$71.1
GND11: C12.2 J12.6 U12.4 U$78.1
GND12: C13.2 J13.6 U13.4 U$85.1
GND13: C14.2 J14.6 U14.4 U$92.1
GND14: C15.2 J15.6 U15.4 U$99.1
GND15: C16.2 J16.6 U16.4 U$106.1
GND16: C17.2 J17.6 U17.4 U$113.1
GND17: C18.2 J18.6 U18.4 U$120.1
GND18: C19.2 J19.6 U19.4 U$127.1
GND19: C20.2 J20.6 U20.4 U$134.1
GND20: C21.2 J21.6 U21.4 U$141.1
GND21: C22.2 J22.6 U22.4 U$148.1
GND22: C23.2 J23.6 U23.4 U$155.1
GND23: C24.2 J24.6 U24.4 U$162.1
GND24: C25.2 J25.6 U25.4 U$169.1
MISO: J1.1 U1.6 U$3.1
MISO1: J2.1 U2.6 U$9.1
MISO2: J3.1 U3.6 U$16.1
MISO3: J4.1 U4.6 U$23.1
MISO4: J5.1 U5.6 U$30.1
MISO5: J6.1 U6.6 U$37.1
MISO6: J7.1 U7.6 U$44.1
MISO7: J8.1 U8.6 U$51.1
MISO8: J9.1 U9.6 U$58.1
MISO9: J10.1 U10.6 U$65.1
MISO10: J11.1 U11.6 U$72.1
MISO11: J12.1 U12.6 U$79.1
MISO12: J13.1 U13.6 U$86.1
MISO13: J14.1 U14.6 U$93.1
MISO14: J15.1 U15.6 U$100.1
MISO15: J16.1 U16.6 U$107.1
MISO16: J17.1 U17.6 U$114.1
MISO17: J18.1 U18.6 U$121.1
MISO18: J19.1 U19.6 U$128.1
MISO19: J20.1 U20.6 U$135.1
MISO20: J21.1 U21.6 U$142.1
MISO21: J22.1 U22.6 U$149.1
MISO22: J23.1 U23.6 U$156.1
MISO23: J24.1 U24.6 U$163.1
MISO24: J25.1 U25.6 U$170.1
MOSI: J1.4 U1.5 U$7.1
MOSI1: J2.4 U2.5 U$13.1
MOSI2: J3.4 U3.5 U$20.1
MOSI3: J4.4 U4.5 U$27.1
MOSI4: J5.4 U5.5 U$34.1
MOSI5: J6.4 U6.5 U$41.1
MOSI6: J7.4 U7.5 U$48.1
MOSI7: J8.4 U8.5 U$55.1
MOSI8: J9.4 U9.5 U$62.1
MOSI9: J10.4 U10.5 U$69.1
MOSI10: J11.4 U11.5 U$76.1
MOSI11: J12.4 U12.5 U$83.1
MOSI12: J13.4 U13.5 U$90.1
MOSI13: J14.4 U14.5 U$97.1
MOSI14: J15.4 U15.5 U$104.1
MOSI15: J16.4 U16.5 U$111.1
MOSI16: J17.4 U17.5 U$118.1
MOSI17: J18.4 U18.5 U$125.1
MOSI18: J19.4 U19.5 U$132.1
MOSI19: J20.4 U20.5 U$139.1
MOSI20: J21.4 U21.5 U$146.1
MOSI21: J22.4 U22.5 U$153.1
MOSI22: J23.4 U23.5 U$160.1
MOSI23: J24.4 U24.5 U$167.1
MOSI24: J25.4 U25.5 U$174.1
N$2: U2.2 U$12.1
N$3: U3.2 U$19.1
N$4: U4.2 U$26.1
N$5: U5.2 U$33.1
N$6: U1.2 U$6.1
N$7: U6.2 U$40.1
N$8: U7.2 U$47.1
N$9: U8.2 U$54.1
N$10: U9.2 U$61.1
N$11: U10.2 U$68.1
N$12: U11.2 U$75.1
N$13: U12.2 U$82.1
N$14: U13.2 U$89.1
N$15: U14.2 U$96.1
N$16: U15.2 U$103.1
N$17: U16.2 U$110.1
N$18: U17.2 U$117.1
N$19: U18.2 U$124.1
N$20: U19.2 U$131.1
N$21: U20.2 U$138.1
N$22: U21.2 U$145.1
N$23: U22.2 U$152.1
N$24: U23.2 U$159.1
N$25: U24.2 U$166.1
N$26: U25.2 U$173.1
NRESET: J1.5 R1.2 U1.1
NRESET1: J2.5 R2.2 U2.1
NRESET2: J3.5 R3.2 U3.1
NRESET3: J4.5 R4.2 U4.1
NRESET4: J5.5 R5.2 U5.1
NRESET5: J6.5 R6.2 U6.1
NRESET6: J7.5 R7.2 U7.1
NRESET7: J8.5 R8.2 U8.1
NRESET8: J9.5 R9.2 U9.1
NRESET9: J10.5 R10.2 U10.1
NRESET10: J11.5 R11.2 U11.1
NRESET11: J12.5 R12.2 U12.1
NRESET12: J13.5 R13.2 U13.1
NRESET13: J14.5 R14.2 U14.1
NRESET14: J15.5 R15.2 U15.1
NRESET15: J16.5 R16.2 U16.1
NRESET16: J17.5 R17.2 U17.1
NRESET17: J18.5 R18.2 U18.1
NRESET18: J19.5 R19.2 U19.1
NRESET19: J20.5 R20.2 U20.1
NRESET20: J21.5 R21.2 U21.1
NRESET21: J22.5 R22.2 U22.1
NRESET22: J23.5 R23.2 U23.1
NRESET23: J24.5 R24.2 U24.1
NRESET24: J25.5 R25.2 U25.1
SCK: J1.3 U1.7 U$4.1
SCK1: J2.3 U2.7 U$10.1
SCK2: J3.3 U3.7 U$17.1
SCK3: J4.3 U4.7 U$24.1
SCK4: J5.3 U5.7 U$31.1
SCK5: J6.3 U6.7 U$38.1
SCK6: J7.3 U7.7 U$45.1
SCK7: J8.3 U8.7 U$52.1
SCK8: J9.3 U9.7 U$59.1
SCK9: J10.3 U10.7 U$66.1
SCK10: J11.3 U11.7 U$73.1
SCK11: J12.3 U12.7 U$80.1
SCK12: J13.3 U13.7 U$87.1
SCK13: J14.3 U14.7 U$94.1
SCK14: J15.3 U15.7 U$101.1
SCK15: J16.3 U16.7 U$108.1
SCK16: J17.3 U17.7 U$115.1
SCK17: J18.3 U18.7 U$122.1
SCK18: J19.3 U19.7 U$129.1
SCK19: J20.3 U20.7 U$136.1
SCK20: J21.3 U21.7 U$143.1
SCK21: J22.3 U22.7 U$150.1
SCK22: J23.3 U23.7 U$157.1
SCK23: J24.3 U24.7 U$164.1
SCK24: J25.3 U25.7 U$171.1
VCC: C1.1 J1.2 R1.1 U1.8 U$5.1
VCC1: C2.1 J2.2 R2.1 U2.8 U$11.1
VCC2: C3.1 J3.2 R3.1 U3.8 U$18.1
VCC3: C4.1 J4.2 R4.1 U4.8 U$25.1
VCC4: C5.1 J5.2 R5.1 U5.8 U$32.1
VCC5: C6.1 J6.2 R6.1 U6.8 U$39.1
VCC6: C7.1 J7.2 R7.1 U7.8 U$46.1
VCC7: C8.1 J8.2 R8.1 U8.8 U$53.1
VCC8: C9.1 J9.2 R9.1 U9.8 U$60.1
VCC9: C10.1 J10.2 R10.1 U10.8 U$67.1
VCC10: C11.1 J11.2 R11.1 U11.8 U$74.1
VCC11: C12.1 J12.2 R12.1 U12.8 U$81.1
VCC12: C13.1 J13.2 R13.1 U13.8 U$88.1
VCC13: C14.1 J14.2 R14.1 U14.8 U$95.1
VCC14: C15.1 J15.2 R15.1 U15.8 U$102.1
VCC15: C16.1 J16.2 R16.1 U16.8 U$109.1
VCC16: C17.1 J17.2 R17.1 U17.8 U$116.1
VCC17: C18.1 J18.2 R18.1 U18.8 U$123.1
VCC18: C19.1 J19.2 R19.1 U19.8 U$130.1
VCC19: C20.1 J20.2 R20.1 U20.8 U$137.1
VCC20: C21.1 J21.2 R21.1 U21.8 U$144.1
VCC21: C22.1 J22.2 R22.1 U22.8 U$151.1
VCC22: C23.1 J23.2 R23.1 U23.8 U$158.1
VCC23: C24.1 J24.2 R24.1 U24.8 U$165.1
VCC24: C25.1 J25.2 R25.1 U25.8 U$172.1